# EAGLE board CT_schematic (EAGLE 7.6.0)

Size 100 x 80 mm. Coordinates in mm from the lower left corner, seen from the top.
Outline: 0,0 100,0 100,80 0,80 0,0
Copper layers (1*16): Top 0.035mm / dielectric 1.5mm / Bottom 0.035mm
Design rules "default": minimum track width 10mil, minimum drill 24mil, track to track 8mil, track to pad 8mil, pad to pad 8mil, via to via 8mil, smd to smd 8mil, copper to edge 40mil, drill to drill 8mil, minimum pad ring 10mil, minimum via ring 8mil, stop-mask expansion 4mil, vias tented up to drill 0mil, thermal gap 10mil

## Footprints (pad centres in the part's own frame; a part is rotated, then mirrored left to right if it is on the bottom)
C0603 = smd 0.8 x 0.8: 1 -0.762,0; 2 0.762,0
C0402 = smd 0.5 x 0.5: 1 -0.508,0; 2 0.508,0
C0805 = smd 1.2 x 1.3: 1 -1.016,0; 2 1.016,0
EXV-9H = smd 3.505 x 1.676: 1 -2.857,0; 2 2.857,0
L1210 = smd 1.2 x 2.5: 1 -1.524,0; 2 1.524,0
DR1040 = smd 1.6 x 3.2: 1 -4.458,0; 2 4.458,0
PJ-037B_PACKAGE = drill 3.7 square: 1 12,0 | drill 3.2 square: 2 6,0
R0603 = smd 0.8 x 0.8: 1 -0.762,0; 2 0.762,0
UFBGA132 = smd 0.32 x 0.32: A1 -2.75,2.75; A2 -2.25,2.75; A3 -1.75,2.75; A4 -1.25,2.75; A5 -0.75,2.75; A6 -0.25,2.75; A7 0.25,2.75; A8 0.75,2.75; A9 1.25,2.75; A10 1.75,2.75; A11 2.25,2.75; A12 2.75,2.75; B1 -2.75,2.25; B2 -2.25,2.25; B3 -1.75,2.25; B4 -1.25,2.25; B5 -0.75,2.25; B6 -0.25,2.25; B7 0.25,2.25; B8 0.75,2.25; B9 1.25,2.25; B10 1.75,2.25; B11 2.25,2.25; B12 2.75,2.25; C1 -2.75,1.75; C2 -2.25,1.75; C3 -1.75,1.75; C4 -1.25,1.75; C5 -0.75,1.75; C6 -0.25,1.75; C7 0.25,1.75; C8 0.75,1.75; C9 1.25,1.75; C10 1.75,1.75; C11 2.25,1.75; C12 2.75,1.75; D1 -2.75,1.25; D2 -2.25,1.25; D3 -1.75,1.25; D4 -1.25,1.25; D5 -0.75,1.25; D6 -0.25,1.25; D7 0.25,1.25; D8 0.75,1.25; D9 1.25,1.25; D10 1.75,1.25; D11 2.25,1.25; D12 2.75,1.25; E1 -2.75,0.75; E2 -2.25,0.75; E3 -1.75,0.75; E4 -1.25,0.75; E9 1.25,0.75; E10 1.75,0.75; E11 2.25,0.75; E12 2.75,0.75; F1 -2.75,0.25; F2 -2.25,0.25; F3 -1.75,0.25; F4 -1.25,0.25; F6 -0.25,0.25; F7 0.25,0.25; F9 1.25,0.25; F10 1.75,0.25; F11 2.25,0.25; F12 2.75,0.25; G1 -2.75,-0.25; G2 -2.25,-0.25; G3 -1.75,-0.25; G4 -1.25,-0.25; G6 -0.25,-0.25; G7 0.25,-0.25; G9 1.25,-0.25; G10 1.75,-0.25; G11 2.25,-0.25; G12 2.75,-0.25; H1 -2.75,-0.75; H2 -2.25,-0.75; H3 -1.75,-0.75; H4 -1.25,-0.75; H9 1.25,-0.75; H10 1.75,-0.75; H11 2.25,-0.75; H12 2.75,-0.75; J1 -2.75,-1.25; J2 -2.25,-1.25; J3 -1.75,-1.25; J4 -1.25,-1.25; J5 -0.75,-1.25; J6 -0.25,-1.25; J7 0.25,-1.25; J8 0.75,-1.25; J9 1.25,-1.25; J10 1.75,-1.25; J11 2.25,-1.25; J12 2.75,-1.25; K1 -2.75,-1.75; K2 -2.25,-1.75; K3 -1.75,-1.75; K4 -1.25,-1.75; K5 -0.75,-1.75; K6 -0.25,-1.75; K7 0.25,-1.75; K8 0.75,-1.75; K9 1.25,-1.75; K10 1.75,-1.75; K11 2.25,-1.75; K12 2.75,-1.75; L1 -2.75,-2.25; L2 -2.25,-2.25; L3 -1.75,-2.25; L4 -1.25,-2.25; L5 -0.75,-2.25; L6 -0.25,-2.25; L7 0.25,-2.25; L8 0.75,-2.25; L9 1.25,-2.25; L10 1.75,-2.25; L11 2.25,-2.25; L12 2.75,-2.25; M1 -2.75,-2.75; M2 -2.25,-2.75; M3 -1.75,-2.75; M4 -1.25,-2.75; M5 -0.75,-2.75; M6 -0.25,-2.75; M7 0.25,-2.75; M8 0.75,-2.75; M9 1.25,-2.75; M10 1.75,-2.75; M11 2.25,-2.75; M12 2.75,-2.75
SOIC-8 = smd 1.6 x 0.6: 1 -2.7,1.905 | smd 1.55 x 0.6: 2 -2.7,0.635; 3 -2.7,-0.635; 4 -2.7,-1.905; 5 2.7,-1.905; 6 2.7,-0.635; 7 2.7,0.635; 8 2.7,1.905
SSOP-28 = smd 1.5 x 0.4: 1 -3.625,4.225; 2 -3.625,3.575; 3 -3.625,2.925; 4 -3.625,2.275; 5 -3.625,1.625; 6 -3.625,0.975; 7 -3.625,0.325; 8 -3.625,-0.325; 9 -3.625,-0.975; 10 -3.625,-1.625; 11 -3.625,-2.275; 12 -3.625,-2.925; 13 -3.625,-3.575; 14 -3.625,-4.225; 15 3.625,-4.225; 16 3.625,-3.575; 17 3.625,-2.925; 18 3.625,-2.275; 19 3.625,-1.625; 20 3.625,-0.975; 21 3.625,-0.325; 22 3.625,0.325; 23 3.625,0.975; 24 3.625,1.625; 25 3.625,2.275; 26 3.625,2.925; 27 3.625,3.575; 28 3.625,4.225
FCI_10118193-0001LF = smd 0.4 x 1.35: 1 -1.3,2.675; 2 -0.65,2.675; 3 0,2.675; 4 0.65,2.675; 5 1.3,2.675 | smd 1.6 x 1.4: 6 -3.2,2.45; 7 3.2,2.45 | smd 1.9 x 1.9: 8 -1.2,0; 9 1.2,0 | hole 0.5: -3.3,0; 3.3,0
SSOP-20 = smd 1.651 x 0.432: 1 -3.48,2.925; 2 -3.48,2.275; 3 -3.48,1.625; 4 -3.48,0.975; 5 -3.48,0.325; 6 -3.48,-0.325; 7 -3.48,-0.975; 8 -3.48,-1.625; 9 -3.48,-2.275; 10 -3.48,-2.925; 11 3.48,-2.925; 12 3.48,-2.275; 13 3.48,-1.625; 14 3.48,-0.975; 15 3.48,-0.325; 16 3.48,0.325; 17 3.48,0.975; 18 3.48,1.625; 19 3.48,2.275; 20 3.48,2.925
HTSS-105-01-G-D = drill 1 pad 1.8 square: 1 0,0 | drill 1 pad 1.8: 2 0,2.54; 3 2.54,0; 4 2.54,2.54; 5 5.08,0; 6 5.08,2.54; 7 7.62,0; 8 7.62,2.54; 9 10.16,0; 10 10.16,2.54
TFBGA-153 = smd 0.3 x 0.3: A1 -3.25,3.25; A2 -2.75,3.25; A3 -2.25,3.25; A4 -1.75,3.25; A5 -1.25,3.25; A6 -0.75,3.25; A7 -0.25,3.25; A8 0.25,3.25; A9 0.75,3.25; A10 1.25,3.25; A11 1.75,3.25; A12 2.25,3.25; A13 2.75,3.25; A14 3.25,3.25; B1 -3.25,2.75; B2 -2.75,2.75; B3 -2.25,2.75; B4 -1.75,2.75; B5 -1.25,2.75; B6 -0.75,2.75; B7 -0.25,2.75; B8 0.25,2.75; B9 0.75,2.75; B10 1.25,2.75; B11 1.75,2.75; B12 2.25,2.75; B13 2.75,2.75; B14 3.25,2.75; C1 -3.25,2.25; C2 -2.75,2.25; C3 -2.25,2.25; C4 -1.75,2.25; C5 -1.25,2.25; C6 -0.75,2.25; C7 -0.25,2.25; C8 0.25,2.25; C9 0.75,2.25; C10 1.25,2.25; C11 1.75,2.25; C12 2.25,2.25; C13 2.75,2.25; C14 3.25,2.25; D1 -3.25,1.75; D2 -2.75,1.75; D3 -2.25,1.75; D4 -1.75,1.75; D12 2.25,1.75; D13 2.75,1.75; D14 3.25,1.75; E1 -3.25,1.25; E2 -2.75,1.25; E3 -2.25,1.25; E5 -1.25,1.25; E6 -0.75,1.25; E7 -0.25,1.25; E8 0.25,1.25; E9 0.75,1.25; E10 1.25,1.25; E12 2.25,1.25; E13 2.75,1.25; E14 3.25,1.25; F1 -3.25,0.75; F2 -2.75,0.75; F3 -2.25,0.75; F5 -1.25,0.75; F10 1.25,0.75; F12 2.25,0.75; F13 2.75,0.75; F14 3.25,0.75; G1 -3.25,0.25; G2 -2.75,0.25; G3 -2.25,0.25; G5 -1.25,0.25; G10 1.25,0.25; G12 2.25,0.25; G13 2.75,0.25; G14 3.25,0.25; H1 -3.25,-0.25; H2 -2.75,-0.25; H3 -2.25,-0.25; H5 -1.25,-0.25; H10 1.25,-0.25; H12 2.25,-0.25; H13 2.75,-0.25; H14 3.25,-0.25; J1 -3.25,-0.75; J2 -2.75,-0.75; J3 -2.25,-0.75; J5 -1.25,-0.75; J10 1.25,-0.75; J12 2.25,-0.75; J13 2.75,-0.75; J14 3.25,-0.75; K1 -3.25,-1.25; K2 -2.75,-1.25; K3 -2.25,-1.25; K5 -1.25,-1.25; K6 -0.75,-1.25; K7 -0.25,-1.25; K8 0.25,-1.25; K9 0.75,-1.25; K10 1.25,-1.25; K12 2.25,-1.25; K13 2.75,-1.25; K14 3.25,-1.25; L1 -3.25,-1.75; L2 -2.75,-1.75; L3 -2.25,-1.75; L12 2.25,-1.75; L13 2.75,-1.75; L14 3.25,-1.75; M1 -3.25,-2.25; M2 -2.75,-2.25; M3 -2.25,-2.25; M4 -1.75,-2.25; M5 -1.25,-2.25; M6 -0.75,-2.25; M7 -0.25,-2.25; M8 0.25,-2.25; M9 0.75,-2.25; M10 1.25,-2.25; M11 1.75,-2.25; M12 2.25,-2.25; M13 2.75,-2.25; M14 3.25,-2.25; N1 -3.25,-2.75; N2 -2.75,-2.75; N3 -2.25,-2.75; N4 -1.75,-2.75; N5 -1.25,-2.75; N6 -0.75,-2.75; N7 -0.25,-2.75; N8 0.25,-2.75; N9 0.75,-2.75; N10 1.25,-2.75; N11 1.75,-2.75; N12 2.25,-2.75; N13 2.75,-2.75; N14 3.25,-2.75; P1 -3.25,-3.25; P2 -2.75,-3.25; P3 -2.25,-3.25; P4 -1.75,-3.25; P5 -1.25,-3.25; P6 -0.75,-3.25; P7 -0.25,-3.25; P8 0.25,-3.25; P9 0.75,-3.25; P10 1.25,-3.25; P11 1.75,-3.25; P12 2.25,-3.25; P13 2.75,-3.25; P14 3.25,-3.25
ABLS-25.000MHZ-B2F-T = smd 5.6 x 2.8: 1 -3.81,0; 2 5.69,0
ABLS-12.000MHZ-B4-T = smd 5.6 x 2.8: 1 0,0; 2 9.5,0
ASEK = smd 1.4 x 1: 1 -1.1,-0.8; 2 1.1,-0.8; 3 1.1,0.8; 4 -1.1,0.8
TSOT-23-5 = smd 1.3 x 0.62: 1 -1.31,0.95; 2 -1.31,0; 3 -1.31,-0.95; 4 1.31,-0.95; 5 1.31,0.95
SON-6 = smd 0.55 x 0.3: 1 -0.355,0.5 | smd 0.52 x 0.3: 2 -0.37,0; 3 -0.37,-0.5; 4 0.37,-0.5; 5 0.37,0; 6 0.37,0.5
SW_4-1437565-2 = smd 1.4 x 2.1: 1 -2.23,4.55; 2 -2.23,-4.55; 3 2.23,4.55; 4 2.23,-4.55
LGM67K-G1J2-24-Z = smd 0.8 x 1.4: A -2,0; C 0,0
NC7SZ125M5X = smd 1.3 x 0.7: 1 -1.3,0.95; 2 -1.3,0; 3 -1.3,-0.95; 4 1.3,-0.95; 5 1.3,0.95

## Placement (x,y rotation side)
C1  1e-06  [C0603]  -49.53,68.58 0 top  (outside the outline)
C2  1e-07  [C0603]  -53.34,68.58 0 top  (outside the outline)
C3  1e-07  [C0603]  -57.15,68.58 0 top  (outside the outline)
C4  1e-07  [C0603]  -60.96,68.58 0 top  (outside the outline)
C5  1e-07  [C0603]  -64.77,68.58 0 top  (outside the outline)
C6  1e-07  [C0603]  -68.58,68.58 0 top  (outside the outline)
C7  1e-07  [C0603]  -72.39,68.58 0 top  (outside the outline)
C8  1e-07  [C0603]  -15.24,73.66 0 top  (outside the outline)
C9  1e-07  [C0603]  -19.05,73.66 0 top  (outside the outline)
C10  4.7e-06  [C0603]  -34.29,68.58 0 top  (outside the outline)
C11  1e-07  [C0603]  -22.86,73.66 0 top  (outside the outline)
C12  1e-07  [C0603]  -26.67,73.66 0 top  (outside the outline)
C13  1e-07  [C0603]  -30.48,73.66 0 top  (outside the outline)
C14  1e-08  [C0603]  -34.29,73.66 0 top  (outside the outline)
C15  1e-06  [C0603]  -38.1,73.66 0 top  (outside the outline)
C16  1e-11  [C0402]  -72.39,73.66 0 top  (outside the outline)
C17  1e-11  [C0402]  -15.24,78.74 0 top  (outside the outline)
C18  1e-08  [C0402]  -19.05,78.74 0 top  (outside the outline)
C19  1e-07  [C0402]  -22.86,78.74 0 top  (outside the outline)
C20  4.7e-06  [C0805]  -66.04,50.8 0 top  (outside the outline)
C21  1e-07  [C0402]  -26.67,78.74 0 top  (outside the outline)
C22  1e-07  [C0402]  -30.48,78.74 0 top  (outside the outline)
C23  1e-06  [C0603]  -41.91,73.66 0 top  (outside the outline)
C24  1e-06  [C0603]  -45.72,73.66 0 top  (outside the outline)
C25  1e-06  [C0603]  -49.53,73.66 0 top  (outside the outline)
C26  4.7e-06  [C0805]  -71.12,50.8 0 top  (outside the outline)
C27  1e-07  [C0402]  -34.29,78.74 0 top  (outside the outline)
C28  2.2e-06  [C0603]  -38.1,68.58 0 top  (outside the outline)
C29  2.2e-06  [C0603]  -41.91,68.58 0 top  (outside the outline)
C30  1e-07  [C0402]  -38.1,78.74 0 top  (outside the outline)
C31  1e-07  [C0402]  -41.91,78.74 0 top  (outside the outline)
C32  2.2e-06  [C0603]  -45.72,68.58 0 top  (outside the outline)
C33  1e-08  [C0402]  -45.72,78.74 0 top  (outside the outline)
C34  1e-05  [C0805]  -15.24,58.42 0 top  (outside the outline)
C35  1e-05  [C0805]  -20.32,58.42 0 top  (outside the outline)
C36  1e-07  [C0402]  -49.53,78.74 0 top  (outside the outline)
C37  0.0001  [EXV-9H]  -38.1,44.45 0 top  (outside the outline)
C38  0.0001  [EXV-9H]  -49.53,44.45 0 top  (outside the outline)
C39  1e-08  [C0402]  -53.34,78.74 0 top  (outside the outline)
C40  1e-08  [C0402]  -57.15,78.74 0 top  (outside the outline)
I1  1.5e-05  [L1210]  -48.26,52.07 0 top  (outside the outline)
I2  5.2e-06  [DR1040]  -54.61,22.86 0 top  (outside the outline)
J1  PJ-037B  [PJ-037B_PACKAGE]  -55.88,7.62 0 top  (outside the outline)
R2  1000.0  [R0603]  -53.34,73.66 0 top  (outside the outline)
R4  4700.0  [R0603]  -57.15,73.66 0 top  (outside the outline)
R5  4700.0  [R0603]  -60.96,73.66 0 top  (outside the outline)
R6  10000.0  [R0603]  -68.58,58.42 0 top  (outside the outline)
R7  10000.0  [R0603]  -73.66,58.42 0 top  (outside the outline)
R8  10000.0  [R0603]  -15.24,63.5 0 top  (outside the outline)
R9  10000.0  [R0603]  -20.32,63.5 0 top  (outside the outline)
R10  4700.0  [R0603]  -64.77,73.66 0 top  (outside the outline)
R11  10000.0  [R0603]  -25.4,63.5 0 top  (outside the outline)
R12  10000.0  [R0603]  -30.48,63.5 0 top  (outside the outline)
R13  100000.0  [R0603]  -38.1,58.42 0 top  (outside the outline)
R14  100000.0  [R0603]  -43.18,58.42 0 top  (outside the outline)
R15  100000.0  [R0603]  -48.26,58.42 0 top  (outside the outline)
R16  34000.0  [R0603]  -35.56,63.5 0 top  (outside the outline)
R17  34000.0  [R0603]  -40.64,63.5 0 top  (outside the outline)
R18  34000.0  [R0603]  -45.72,63.5 0 top  (outside the outline)
R19  34000.0  [R0603]  -50.8,63.5 0 top  (outside the outline)
R20  34000.0  [R0603]  -55.88,63.5 0 top  (outside the outline)
R21  34000.0  [R0603]  -60.96,63.5 0 top  (outside the outline)
R22  34000.0  [R0603]  -66.04,63.5 0 top  (outside the outline)
R23  34000.0  [R0603]  -71.12,63.5 0 top  (outside the outline)
R24  34000.0  [R0603]  -15.24,68.58 0 top  (outside the outline)
R25  34000.0  [R0603]  -20.32,68.58 0 top  (outside the outline)
R26  220000.0  [R0603]  -53.34,58.42 0 top  (outside the outline)
R27  1000000.0  [R0603]  -33.02,58.42 0 top  (outside the outline)
R28  10000.0  [R0603]  -25.4,68.58 0 top  (outside the outline)
R29  10000.0  [R0603]  -30.48,68.58 0 top  (outside the outline)
R30  9100.0  [R0603]  -68.58,73.66 0 top  (outside the outline)
R31  680000.0  [R0603]  -58.42,58.42 0 top  (outside the outline)
R32  120000.0  [R0603]  -63.5,58.42 0 top  (outside the outline)
U1  STM32L476QGI6  [UFBGA132]  -44.45,24.13 0 top  (outside the outline)
U2  AT25040B-SSHL-T  [SOIC-8]  -43.18,35.56 0 top  (outside the outline)
U3  FT232RL-REEL  [SSOP-28]  -35.56,7.62 0 top  (outside the outline)
U4  10118193-0001LF  [FCI_10118193-0001LF]  -63.5,34.29 0 top  (outside the outline)
U5  MAX3218EAP+T  [SSOP-20]  -53.34,34.29 0 top  (outside the outline)
U6  HTSS-105-01-G-D  [HTSS-105-01-G-D]  -27.94,34.29 0 top  (outside the outline)
U7  mtfc4gmcdm  [TFBGA-153]  -20.32,8.89 0 top  (outside the outline)
U8  ABLS-25.000MHZ-B2F-T  [ABLS-25.000MHZ-B2F-T]  -68.58,44.45 0 top  (outside the outline)
U9  ABLS-12.000MHZ-B4-T  [ABLS-12.000MHZ-B4-T]  -29.21,52.07 0 top  (outside the outline)
U10  ASEK-32.768KHz-ECST  [ASEK]  -29.21,44.45 0 top  (outside the outline)
U11  ltc3406es5  [TSOT-23-5]  -25.4,58.42 0 top  (outside the outline)
U12  TPS3895ADRYR  [SON-6]  -59.69,77.47 0 top  (outside the outline)
U13  4-1437565-2  [SW_4-1437565-2]  -27.94,24.13 0 top  (outside the outline)
U14  Q65110A2395  [LGM67K-G1J2-24-Z]  -36.83,52.07 0 top  (outside the outline)
U15  nc7sz125m5x  [NC7SZ125M5X]  -53.34,50.8 0 top  (outside the outline)
U16  nc7sz125m5x  [NC7SZ125M5X]  -59.69,50.8 0 top  (outside the outline)

## Library data of the parts
C1-C40 I1 I2 J1 R2 R4-R32 U1-U16 = circuit_tree

## Nets
CLK_CRYSTAL_U1_F1: C16.1 U1.F1 U8.1
CLK_CRYSTAL_U1_G1: C17.1 U1.G1 U8.2
CLK_CRYSTAL_U3_27: U3.27 U9.1
CLK_CRYSTAL_U3_28: U3.28 U9.2
CLK_U1_D1: U1.D1 U10.3
GND: C1.2 C2.2 C3.2 C4.2 C5.2 C6.2 C7.2 C8.2 C9.2 C10.2 C11.2 C12.2 C13.2 C14.2 C15.2 C16.2 C17.2 C18.2 C19.2 C20.2 C21.2 C22.2 C23.2 C24.2 C25.2 C27.2 C28.2 C29.2 C30.2 C31.2 C32.2 C33.2 C34.2 C35.1 C35.2 C36.2 C37.2 C38.2 C39.2 C40.2 J1.2 R2.2 R6.2 R12.2 R26.2 R30.2 R32.2 U1.D3 U1.E3 U1.F2 U1.F6 U1.F7 U1.F11 U1.F12 U1.J1 U2.4 U3.7 U3.18 U3.21 U3.25 U3.26 U4.5 U4.6 U4.7 U4.8 U4.9 U5.5 U5.17 U5.20 U6.9 U7.C4 U7.E7 U7.G5 U7.H10 U7.K8 U7.N2 U7.N5 U7.P4 U7.P6 U10.2 U11.2 U12.2 U14.C U15.1 U15.3 U16.1 U16.3
NET_U1_A4: R6.1 U1.A4
NET_U1_H2: R5.1 U1.H2 U16.4
NET_U1_M11: U14.A
NET_U1_M12: U13.3 U13.4
NET_U2_3: R7.1 U2.3
NET_U2_7: R9.1 U2.7
NET_U3_14: R11.1 U3.14
NET_U3_17: C21.1 U3.17
NET_U3_19: R12.1 U3.19
NET_U4_1: R10.1 U4.1
NET_U4_2: U3.16 U4.2
NET_U4_3: U3.15 U4.3
NET_U4_19: R10.2
NET_U5_1: I1.1 U5.1
NET_U5_2: R13.1 U5.2
NET_U5_3: R14.1 U5.3
NET_U5_4: R15.1 U5.4
NET_U5_15: C25.1 U5.15
NET_U5_16: C26.2 U5.16
NET_U5_18: C26.1 U5.18
NET_U5_19: C24.1 U5.19
NET_U6_3: U5.12 U6.3
NET_U6_4: U5.11 U6.4
NET_U6_5: U5.14 U6.5
NET_U6_6: U5.13 U6.6
NET_U7_C2: C29.1 C30.1 U7.C2
NET_U7_K5: R4.1 U7.K5 U15.4
NET_U11_1: U11.1
NET_U11_3: I2.1 U11.3
NET_U11_5: R26.1 R27.1 U11.5
NET_U11_ATNET_3: I2.2 R27.2
NET_U12_1: R29.1 R30.1 U12.1
NET_U12_3: R31.2 R32.1 U12.3
NET_U12_4: R28.1 U12.4 U15.2 U16.2
NET_U13_1: R2.1 U13.1 U13.2
PROC_LPUART1_CTS: U1.E9 U3.3
PROC_LPUART1_RTS: U1.G4 U3.11
PROC_LPUART1_RX: U1.H1 U3.1
PROC_LPUART1_TX: U1.H4 U3.5
PROC_SDMMC1_CK: R25.1 U1.B10 U7.M6
PROC_SDMMC1_CMD: R24.1 U1.C8 U7.M5
PROC_SDMMC1_D0: R16.1 U1.E10 U7.A3
PROC_SDMMC1_D1: R17.1 U1.D12 U7.A4
PROC_SDMMC1_D2: R18.1 U1.B11 U7.A5
PROC_SDMMC1_D3: R19.1 U1.C10 U7.B2
PROC_SDMMC1_D4: R20.1 U1.A3 U7.B3
PROC_SDMMC1_D5: R21.1 U1.B3 U7.B4
PROC_SDMMC1_D6: R22.1 U1.E12 U7.B5
PROC_SDMMC1_D7: R23.1 U1.E11 U7.B6
PROC_SPI1_MISO: U1.A7 U2.2
PROC_SPI1_MOSI: U1.C5 U2.5
PROC_SPI1_NSS: R8.1 U1.J4 U2.1
PROC_SPI1_SCK: U1.A8 U2.6
PROC_UART4_CTS: U1.B4 U5.8
PROC_UART4_RTS: U1.A9 U5.10
PROC_UART4_RX: U1.M2 U5.9
PROC_UART4_TX: U1.L2 U5.7
VCC_S1_5V1: C34.1 C37.1 C38.1 J1.1 U11.4
VCC_TIER1_3V3: C1.1 C2.1 C3.1 C4.1 C5.1 C6.1 C7.1 C8.1 C9.1 C10.1 C11.1 C12.1 C13.1 C14.1 C15.1 C18.1 C19.1 C20.1 C22.1 C23.1 C27.1 C28.1 C31.1 C32.1 C33.1 C35.2 C36.1 C39.1 C40.1 I1.2 I2.2 R4.2 R5.2 R7.2 R8.2 R9.2 R11.2 R13.2 R14.2 R15.2 R16.2 R17.2 R18.2 R19.2 R20.2 R21.2 R22.2 R23.2 R24.2 R25.2 R27.2 R28.2 R29.2 R31.1 U1.C4 U1.C11 U1.E2 U1.G2 U1.G6 U1.G7 U1.G11 U1.G12 U1.H3 U1.L1 U1.M1 U2.8 U3.4 U3.20 U5.6 U7.C6 U7.E6 U7.F5 U7.J10 U7.K9 U7.M4 U7.N4 U7.P3 U7.P5 U10.4 U12.6 U15.5 U16.5

## Tracks (layer width: path | path; a pad name or v marks a point on that pad's centre or on a via)
CLK_CRYSTAL_U1_F1  (2 unrouted)
CLK_CRYSTAL_U1_G1  (2 unrouted)
CLK_CRYSTAL_U3_27  (1 unrouted)
CLK_CRYSTAL_U3_28  (1 unrouted)
CLK_U1_D1  (1 unrouted)
GND  (86 unrouted)
NET_U1_A4  (1 unrouted)
NET_U1_H2  (2 unrouted)
NET_U1_M12  (1 unrouted)
NET_U2_3  (1 unrouted)
NET_U2_7  (1 unrouted)
NET_U3_14  (1 unrouted)
NET_U3_17  (1 unrouted)
NET_U3_19  (1 unrouted)
NET_U4_1  (1 unrouted)
NET_U4_2  (1 unrouted)
NET_U4_3  (1 unrouted)
NET_U5_1  (1 unrouted)
NET_U5_2  (1 unrouted)
NET_U5_3  (1 unrouted)
NET_U5_4  (1 unrouted)
NET_U5_15  (1 unrouted)
NET_U5_16  (1 unrouted)
NET_U5_18  (1 unrouted)
NET_U5_19  (1 unrouted)
NET_U6_3  (1 unrouted)
NET_U6_4  (1 unrouted)
NET_U6_5  (1 unrouted)
NET_U6_6  (1 unrouted)
NET_U7_C2  (2 unrouted)
NET_U7_K5  (2 unrouted)
NET_U11_3  (1 unrouted)
NET_U11_5  (2 unrouted)
NET_U11_ATNET_3  (1 unrouted)
NET_U12_1  (2 unrouted)
NET_U12_3  (2 unrouted)
NET_U12_4  (3 unrouted)
NET_U13_1  (2 unrouted)
PROC_LPUART1_CTS  (1 unrouted)
PROC_LPUART1_RTS  (1 unrouted)
PROC_LPUART1_RX  (1 unrouted)
PROC_LPUART1_TX  (1 unrouted)
PROC_SDMMC1_CK  (2 unrouted)
PROC_SDMMC1_CMD  (2 unrouted)
PROC_SDMMC1_D0  (2 unrouted)
PROC_SDMMC1_D1  (2 unrouted)
PROC_SDMMC1_D2  (2 unrouted)
PROC_SDMMC1_D3  (2 unrouted)
PROC_SDMMC1_D4  (2 unrouted)
PROC_SDMMC1_D5  (2 unrouted)
PROC_SDMMC1_D6  (2 unrouted)
PROC_SDMMC1_D7  (2 unrouted)
PROC_SPI1_MISO  (1 unrouted)
PROC_SPI1_MOSI  (1 unrouted)
PROC_SPI1_NSS  (2 unrouted)
PROC_SPI1_SCK  (1 unrouted)
PROC_UART4_CTS  (1 unrouted)
PROC_UART4_RTS  (1 unrouted)
PROC_UART4_RX  (1 unrouted)
PROC_UART4_TX  (1 unrouted)
VCC_S1_5V1  (4 unrouted)
VCC_TIER1_3V3  (81 unrouted)